# Altium PCB TelemetryBoardPCB.PcbDoc
Units mm, origin at the board's own origin, x right, y up, seen from the top; angles counter-clockwise.
Board outline 84.17 x 68.93 mm, 2 copper layers (Top Layer, Bottom Layer), stack 0.325 mm thick; 13 components, 13 nets, 135 pads, 12 vias.
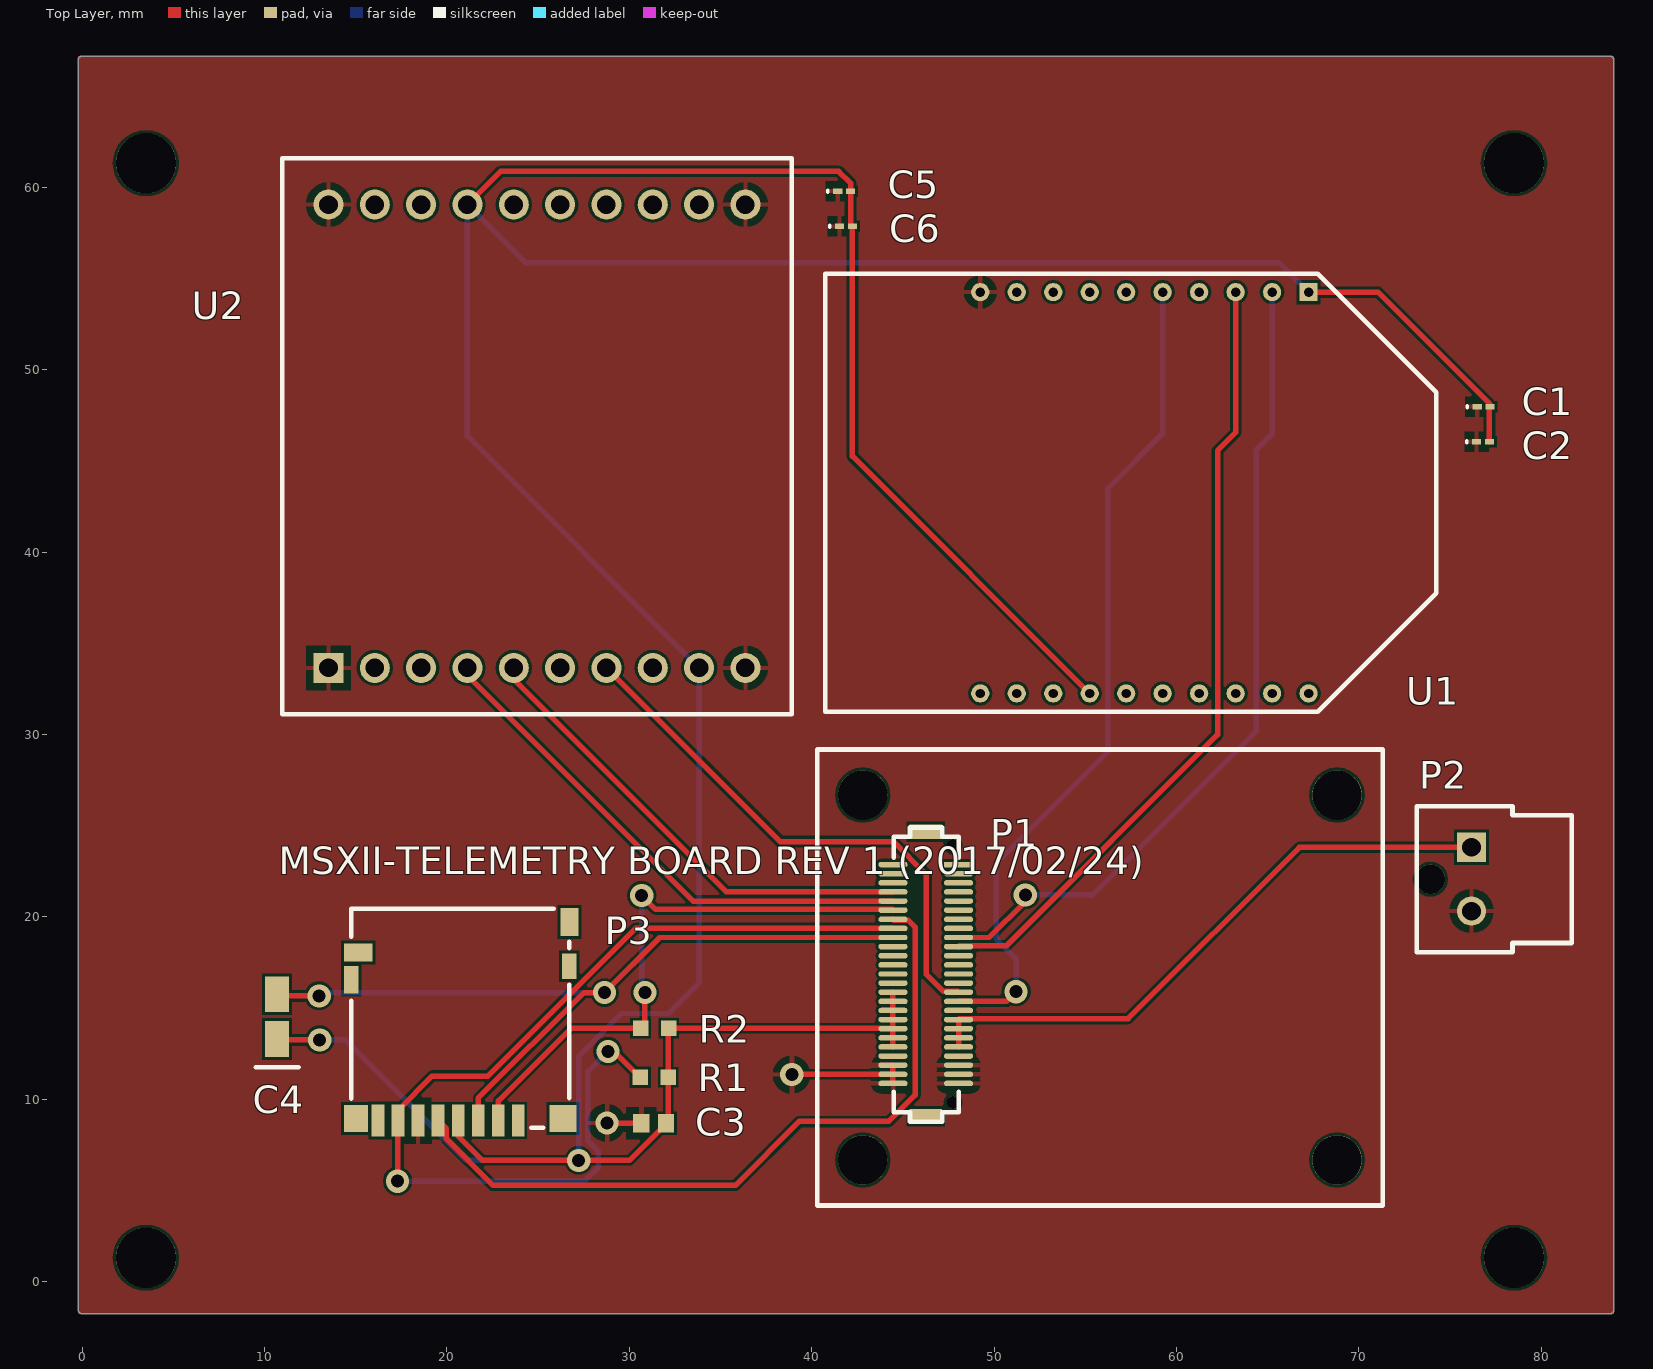
[diagram p0: Top Layer view]
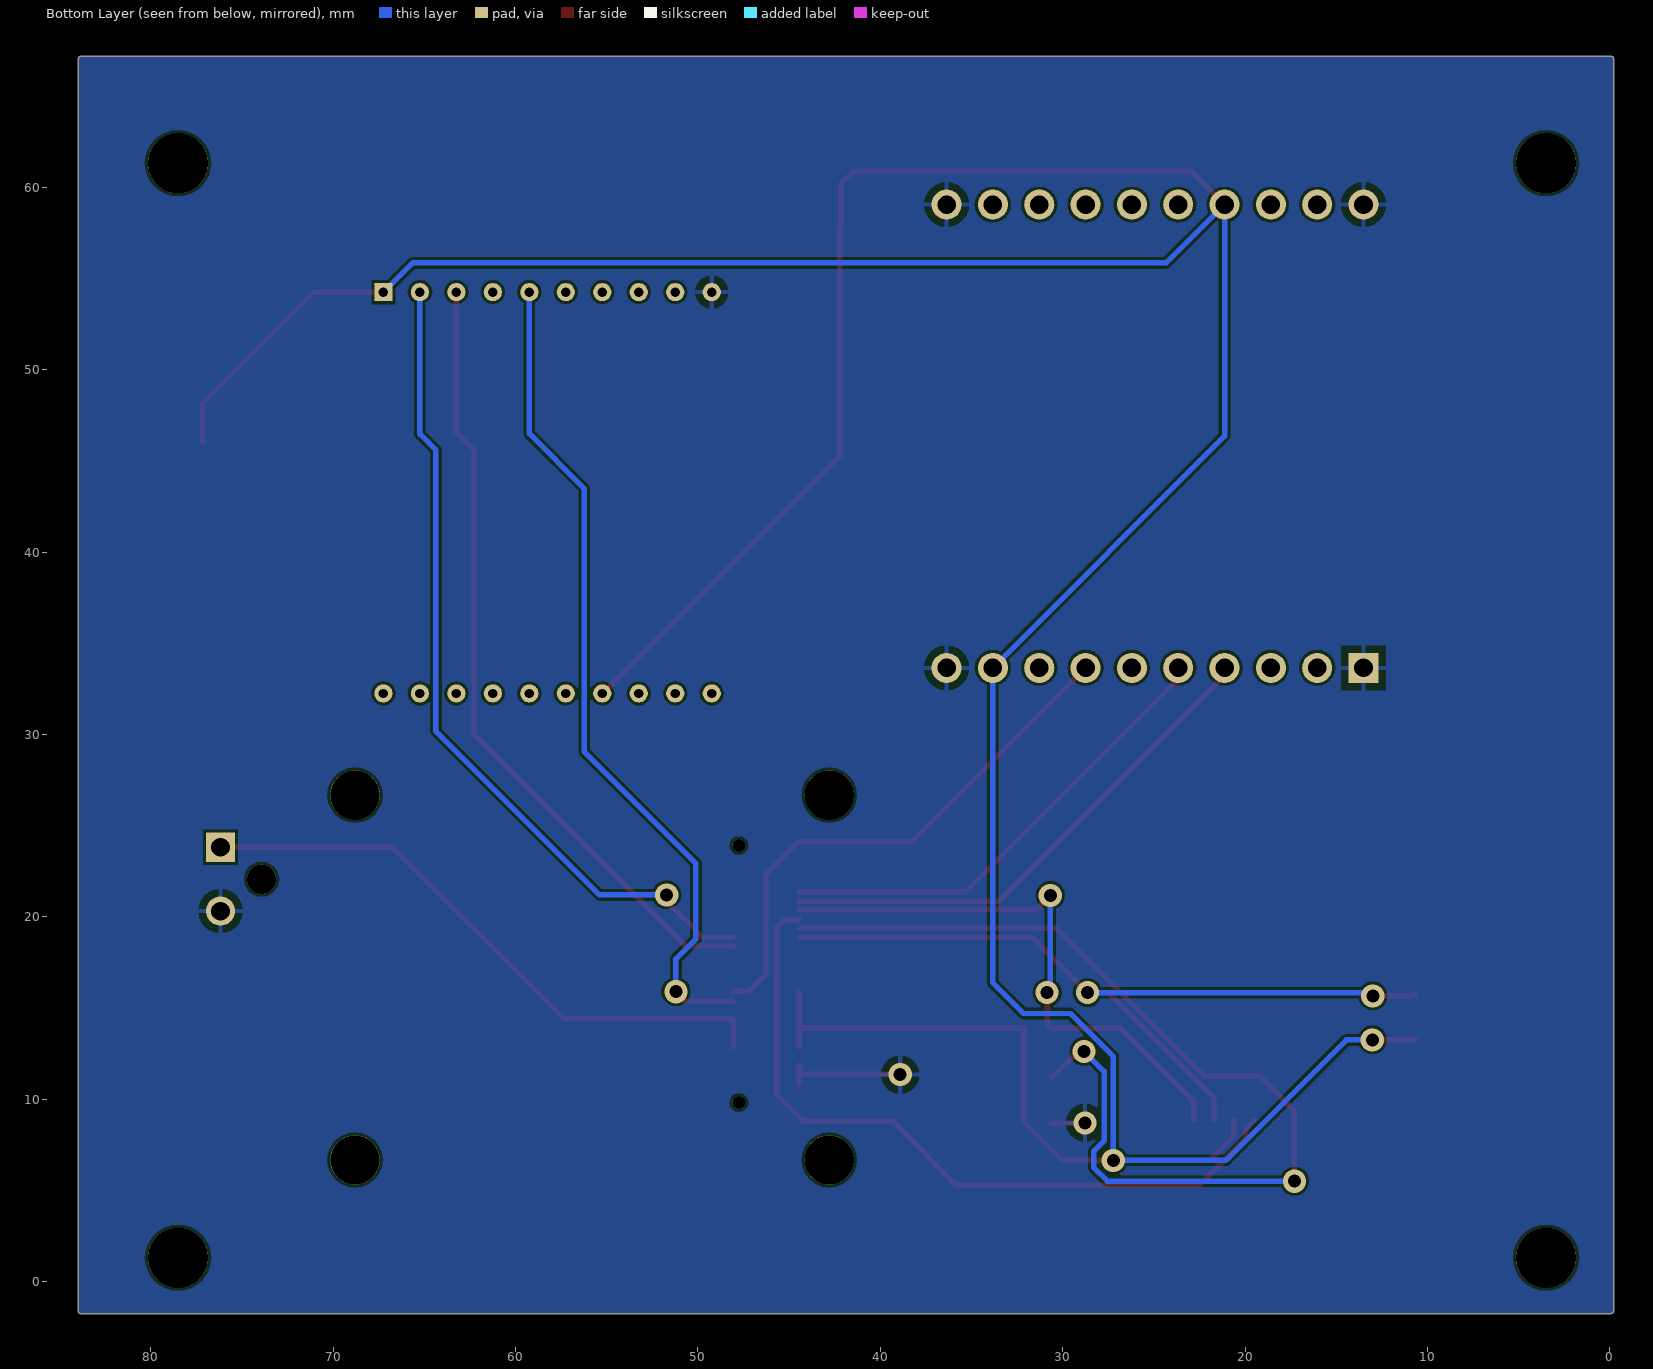
[diagram p1: Bottom Layer view, seen from below]

## Layer stack, top to bottom
Top Solder: solder mask 0.0102, Solder Resist, Dk 3.5
Top Layer: signal copper 0.0356
Dielectric 1: core 0.254, FR-4, Dk 4.2
Bottom Layer: signal copper 0.0356
Bottom Solder: solder mask 0.0102, Solder Resist, Dk 3.5

## Board outline
-0.201,-1.575 ccw(c-0.051,-1.575) -0.144,-1.693 ccw(c-0.025,-1.6) -0.025,-1.751 83.82,-1.751 ccw(c83.82,-1.6) 83.97,-1.6 83.97,67.031 ccw(c83.82,67.031) 83.82,67.181 -0.051,67.181 ccw(c-0.051,67.031) -0.201,67.031

## Design rules (kind name [scope] priority, off if disabled: settings)
Clearance [All] p1: gap=0.152
PolygonConnect [All] p1: connectstyle=Relief reliefconductorwidth=0.254 reliefentries=4 polygonreliefangle="90 Angle" airgapwidth=0.4
RoutingVias [All] p1: holewidth=0.3 width=0.605 viastyle="Through Hole" minholewidth=0.3 minwidth=0.605 maxholewidth=6.3 maxwidth=6.605
SolderMaskExpansion [All] p1: expansion=0.102
Width [All] p1: maxlimit=1.22 minlimit=0.152 preferedwidth=0.203
30 further rules are at their usual default settings.

## Components (designator, comment, footprint, x,y, rotation, side; value= is the part's Value field where it differs from the comment)
C1 "0.1uF" 0603 76.841,47.981 r0 top
C2 "0.1uF" 0603 76.81,46.05 r0 top
C3 "0.1uF" CAPC1608X06N 31.344,8.687 r0 top
C4 "22uF" "CAP TANT 22UF 6.3V 10% 1206" 10.043,12.41 r90 top
C5 "10uF" 0603 41.783,59.792 r0 top
C6 "10uF" 0603 41.885,57.861 r0 top
P1 "BergStak Plug" 609-5226-1-ND 46.257,16.872 r180 bottom
P2 "Ultra-Fit" WM11673-ND 76.175,23.82 r270 top
P3 "MicroSD_Reader" MICROSD_READER 63.421,-83.853 r0 top (schematic designator P?)
R1 "10K" RESC1608X06N 31.369,11.201 r0 top
R2 "10K" RESC1608X06N 31.394,13.894 r0 top
U1 "XBee" XBee-PRO 67.246,54.254 r270 top
U2 "GPS" EVM-GPS-F4 13.513,33.655 r90 top

## Footprints (in the part's own frame and the unit in brackets; to place one, negate y for a bottom-side part, rotate by r counter-clockwise, add the part's x,y. Pads: shape width x height; smd on the part's side, far side on the other; paste and mask are expansions set on the pad)
0603 [mm] "Chip Inductor, Body 0.6x0.3mm, IPC High Density"
  rect 0.5x0.3 smd: 1(-0.35,0) 2(0.35,0)
  silkscreen extent -0.9,-0.05 -0.9,0.05, body extent -0.33,-0.18 0.33,0.18, height 0.55
609-5226-1-ND [mm] "Bergstack Plug"
  rect 1.6x0.3 smd far side: 1(-1.8,6)
  oval 1.6x0.3 smd far side: 2(-1.8,5.5) 3(-1.8,5) 4(-1.8,4.5) 5(-1.8,4) 6(-1.8,3.5) 7(-1.8,3) 8(-1.8,2.5) 9(-1.8,2) 10(-1.8,1.5) 11(-1.8,1) 12(-1.8,0.5) 13(-1.8,0) 14(-1.8,-0.5) 15(-1.8,-1) 16(-1.8,-1.5) 17(-1.8,-2) 18(-1.8,-2.5) 19(-1.8,-3) 20(-1.8,-3.5) 21(-1.8,-4) 22(-1.8,-4.5) 23(-1.8,-5) 24(-1.8,-5.5) 25(-1.8,-6) 26(1.8,-6) 27(1.8,-5.5) 28(1.8,-5) 29(1.8,-4.5) 30(1.8,-4) 31(1.8,-3.5) 32(1.8,-3) 33(1.8,-2.5) 34(1.8,-2) 35(1.8,-1.5) 36(1.8,-1) 37(1.8,-0.5) 38(1.8,0) 39(1.8,0.5) 40(1.8,1) 41(1.8,1.5) 42(1.8,2) 43(1.8,2.5) 44(1.8,3) 45(1.8,3.5) 46(1.8,4) 47(1.8,4.5) 48(1.8,5) 49(1.8,5.5) 50(1.8,6)
  round 0.7 hole 0.7: ""(-1.5,-7.05) ""(-1.5,7.05)
  rect 1.8x0.8 smd far side: ""(0,-7.8) ""(0,7.8)
"CAP TANT 22UF 6.3V 10% 1206" [mm] "22µF ±10% Molded Tantalum Capacitors 6.3V 1206 (3216 Metric) 3 Ohm"
  rect 1.95x1.3 smd: 1(3.35,-0.65) 2(0.9,-0.65)
  silkscreen extent -0.65,-1.83 -0.65,0.53, body extent 0.42,-1.55 3.82,0.25, height 1.1
CAPC1608X06N [mm] "Chip Capacitor, 2-Leads, Body 1.60x0.81mm, IPC Medium Density"
  rect 0.9x1 smd mask+0.076: 1(-0.675,0) 2(0.675,0)
  body extent -0.87,-0.48 0.87,0.48, height 0.9
EVM-GPS-F4 [mil] "GPS Module"
  rect 65x65 hole 40: 1(0,0)
  round 65 hole 40: 2(0,-100) 3(0,-200) 4(0,-300) 5(0,-400) 6(0,-500) 7(0,-600) 8(0,-700) 9(0,-800) 10(0,-900) 11(1000,-900) 12(1000,-800) 13(1000,-700) 14(1000,-600) 15(1000,-500) 16(1000,-400) 17(1000,-300) 18(1000,-200) 19(1000,-100) 20(1000,0)
  silkscreen extent -100,-1000 1100,100
MICROSD_READER [mm]
  rect 0.7x1.75 smd: 1(-39.5,92.7) 2(-40.6,92.7) 3(-41.7,92.7) 4(-42.8,92.7) 5(-43.9,92.7) 6(-45,92.7) 7(-46.1,92.7) 8(-47.2,92.7)
  rect 1.3x1.5 smd: 9(-48.4,92.8)
  rect 0.8x1.5 smd: 10(-48.65,100.4)
  rect 1.55x1 smd: 11(-48.275,101.9)
  rect 1x1.55 smd: 12(-36.7,103.575)
  rect 0.8x1.4 smd: 13(-36.7,101.15)
  rect 1.5x1.5 smd: 14(-37.05,92.8)
  silkscreen extent -48.65,92.3 -36.7,104.3
RESC1608X06N [mm] "Chip Resistor, 2-Leads, Body 1.60x0.80mm, IPC Medium Density"
  rect 0.85x0.85 smd: 1(-0.775,0) 2(0.775,0)
  body extent -0.8,-0.4 0.8,0.4, height 0.55
WM11673-ND [mm] "2 Positions Header, Shrouded Connector 0.138\" (3.50mm) Through Hole Gold"
  rect 1.6x1.6 hole 1.02: 1(0,0)
  round 1.6 hole 1.02: 2(3.5,0)
  round 1.6 hole 1.6: ""(1.75,-2.25)
  silkscreen extent -2.25,-3 5.75,5.5
XBee-PRO [mm] "XBee-PRO"
  rect 1x1 hole 0.51: 1(0,0)
  round 1 hole 0.51: 2(0,-2) 3(0,-4) 4(0,-6) 5(0,-8) 6(0,-10) 7(0,-12) 8(0,-14) 9(0,-16) 10(0,-18) 11(22,-18) 12(22,-16) 13(22,-14) 14(22,-12) 15(22,-10) 16(22,-8) 17(22,-6) 18(22,-4) 19(22,-2) 20(22,0)
  silkscreen extent -1,-26.5 23,7

## Part data
C1 C2 C3: library part "CAP CER 0.1UF 50V 10% X7R 0603", "0.10µF ±10% 50V Ceramic Capacitor X7R 0603 (1608 Metric)"
C4: library part "CAP TANT 22UF 6.3V 10% 1206", "22µF ±10% Molded Tantalum Capacitors 6.3V 1206 (3216 Metric) 3 Ohm"
C5 C6: library part "CAP CER 10uF 25V 20% X5R 0603", "10µF ±20% 25V Ceramic Capacitor X5R 0603 (1608 Metric)"
P1: library part "BergStak 50 Position Connector Plug", "50 Position Connector Plug, Outer Shroud Contacts Surface Mount Gold"
P2: library part "2 Position Ultra-Fit Connector", "2 Positions Header, Shrouded Connector 0.138\" (3.50mm) Through Hole Gold"
P3: "CONN MICRO SD CARD PUSH-PULL R/A"
R1 R2: library part "RES SMD 10K OHM 1% 1/10W 0603", "RES SMD 10K OHM 1% 1/10W 0603"
U2: "GPS Module"

## Free pads (board coordinates)
  round 2.7 hole 2.7: 0(42.805,6.678) 1(68.805,6.678) 2(42.805,26.678) 3(68.805,26.678)
  round 3.3 hole 3.3: 4(78.506,61.319) 5(78.505,1.319) 6(3.505,1.319) 7(3.506,61.319)

## Via types
v1: diameter 1.27, hole 0.711, Top Layer to Bottom Layer, 12 vias

## Nets (pads, with @x,y where several pads share a name; then routed paths per layer and width w, separated by ;. In a path a pad name is that pad's centre, name@x,y a point inside that pad or via, vN(x,y) a via of type N, cw(c..) or ccw(c..) an arc to the next point about the centre after c; other vN are vias at no path point)
3V3: C1.2 C2.2 C3.2 C4.2 C5.2 C6.2 P1.30 P1.31 P1.32 P1.33 P1.34 P1.35 P1.36 P3.4 R1.2 R2.2 U1.1 U1.14 U2.9 U2.17 | length 233.5
  Top Layer w0.3: C4.2 10.744,13.259 v1(13.03,13.259) ; P3.4 20.621,7.984 21.95,6.655 v1(27.229,6.655) 30.014,6.655 32.019,8.66 C3.2 32.144,8.812 R1.2 R2.2@32.144,13.868 ; U2.17 22.955,60.877 41.485,60.877 42.133,60.229 C5.2 42.133,57.963 C6.2 42.235,45.266 U1.14 ; R2.2 44.435,13.894 P1.32 ; P1.30 P1.31 P1.32 ; P1.36 P1.35 P1.34 P1.33 P1.32 ; U1.1 71.044,54.254 77.191,48.108 C1.2 77.16,47.95 C2.2
  Bottom Layer w0.3: v1(13.03,13.259) 14.453,13.259 21.057,6.655 v1(27.229,6.655) 27.229,12.349 29.587,14.707 32.156,14.707 33.833,16.383 U2.9 21.133,46.355 U2.17 24.333,55.855 65.646,55.855 U1.1
+12V: P1.18 P1.19 P1.20 P1.21 P2.1 | length 33.5
  Top Layer w0.3: P1.21 P1.20 P1.19 P1.18 48.105,14.42 57.346,14.42 66.746,23.82 P2.1
GND: C1.1 C2.1 C3.1 C5.1 C6.1 P1.23 P1.24 P1.25 P1.26 P1.27 P1.28 P2.2 P3.6 U1.10 U2.1 U2.10 U2.11 U2.20 | length 8.5
  Top Layer w0.3: v1(28.778,8.712) 28.804,8.687 C3.1 ; v1(38.913,11.354) 38.931,11.372 P1.27 ; P1.26 P1.27 ; P1.28 P1.27
PB0: P1.16 U1.5 | length 46
  Top Layer w0.3: P1.16 50.678,15.372 v1(51.206,15.9)
  Bottom Layer w0.3: v1(51.206,15.9) 51.206,17.704 50.114,18.796 50.114,22.936 56.236,29.058 56.236,43.485 59.246,46.495 U1.5
PB1: P1.15 U2.7 | length 29.9
  Top Layer w0.3: U2.7 38.278,24.13 44.488,24.13 46.279,22.339 46.279,16.861 47.22,15.92 48.009,15.92 P1.15
SPI1_MISO: P1.43 P3.7 R1.1 | length 55.9
  Top Layer w0.3: v1(17.297,5.512) 17.321,5.535 P3.7 17.321,9.399 19.199,11.278 22.25,11.278 30.345,19.372 P1.43 ; v1(28.829,12.624) 29.172,12.624 R1.1
  Bottom Layer w0.3: v1(17.297,5.512) 27.559,5.512 28.296,6.248 28.296,7.163 27.737,7.722 27.737,11.532 v1(28.829,12.624)
SPI1_MOSI: C4.1 P1.42 P3.3 | length 45.7
  Top Layer w0.3: C4.1 10.781,15.672 v1(13.005,15.672) ; P3.3 21.721,10.062 27.508,15.85 v1(28.651,15.85) 31.674,18.872 P1.42
  Bottom Layer w0.3: v1(13.005,15.672) 13.183,15.85 v1(28.651,15.85)
SPI1_NSS: P1.45 P3.2 R2.1 | length 32.1
  Top Layer w0.3: P3.2 22.821,9.918 26.797,13.894 R2.1 30.861,14.135 v1(30.861,15.85) ; v1(30.683,21.184) 31.447,20.42 44.409,20.42 P1.45
  Bottom Layer w0.3: v1(30.683,21.184) 30.683,16.027 v1(30.861,15.85)
SPI1_SCK: P1.44 P3.5 | length 40.6
  Top Layer w0.3: P3.5 19.969,8.399 19.969,7.847 22.533,5.283 35.814,5.283 39.319,8.788 44.221,8.788 45.669,10.236 45.669,19.449 45.294,19.824 44.505,19.824 P1.44
USART1_RX: P1.9 U1.2 | length 45.6
  Top Layer w0.3: P1.9 49.733,18.872 51.714,20.853 v1(51.714,21.209)
  Bottom Layer w0.3: v1(51.714,21.209) 55.397,21.209 64.364,30.175 64.364,45.593 65.246,46.475 U1.2
USART1_TX: P1.10 U1.3 | length 43.7
  Top Layer w0.3: P1.10 48.105,18.42 50.678,18.42 62.255,29.997 62.255,45.568 63.246,46.558 U1.3
USART2_RX: P1.46 U2.4 | length 28.9
  Top Layer w0.3: U2.4 21.133,33.249 33.509,20.872 P1.46
USART2_TX: P1.47 U2.5 | length 26.2
  Top Layer w0.3: U2.5 23.673,33.02 35.321,21.372 P1.47
pads on no net: P1. P1.1 P1.2 P1.3 P1.4 P1.5 P1.6 P1.7 P1.8 P1.11 P1.12 P1.13 P1.14 P1.17 P1.22 P1.29 P1.37 P1.38 P1.39 P1.40 P1.41 P1.48 P1.49 P1.50 P2. P3.1 P3.8 P3.9 P3.10 P3.11 P3.12 P3.13 P3.14 U1.4 U1.6 U1.7 U1.8 U1.9 U1.11 U1.12 U1.13 U1.15 U1.16 U1.17 U1.18 U1.19 U1.20 U2.2 U2.3 U2.6 U2.8 U2.12 U2.13 U2.14 U2.15 U2.16 U2.18 U2.19

## Polygon pours and split planes (outlines as drawn)
GND on Bottom Layer "Bottom layer GND" (solid, pour order 6): -0.203,-1.753 -0.203,67.183 83.972,67.183 83.972,-1.753 -0.203,-1.753
GND on Top Layer "Top layer GND" (solid, pour order 8): -0.203,-1.753 -0.203,67.183 83.972,67.183 83.972,-1.778 83.947,-1.753 -0.203,-1.753

## Silkscreen, mask and mechanical layers (free items; w line width, h text height)
Top Overlay:
  lines w0.254: 40.305,4.178 71.305,4.178 71.305,29.178 40.305,29.178 40.305,4.178
  text "MSXII-TELEMETRY BOARD REV 1 (2017/02/24)" at 10.795,22.352 h1.5